# Altium PCB PCB_Node_breakout.PcbDoc
Units mm, origin at the board's own origin, x right, y up, seen from the top; angles counter-clockwise.
Board outline 81.5 x 51 mm, 2 copper layers (Top Layer, Bottom Layer), stack 1.671 mm thick; 3 components, 30 nets, 60 pads, 1 vias.
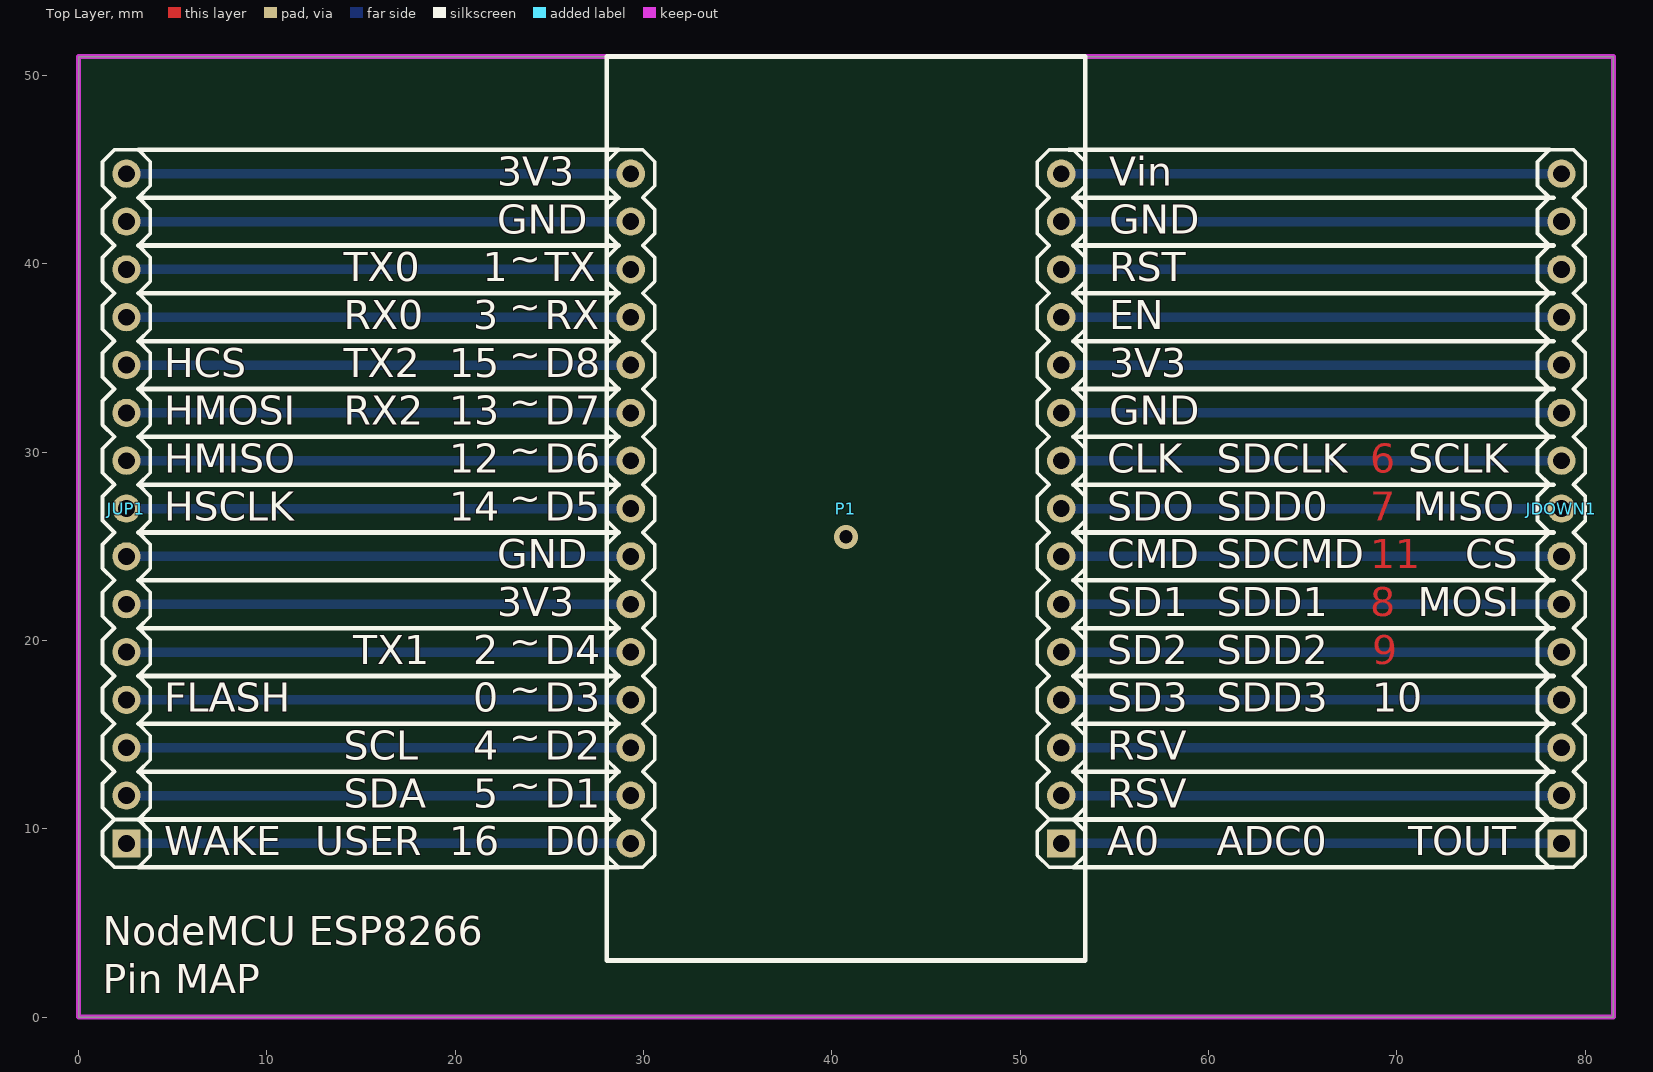
[diagram p0: Top Layer view]
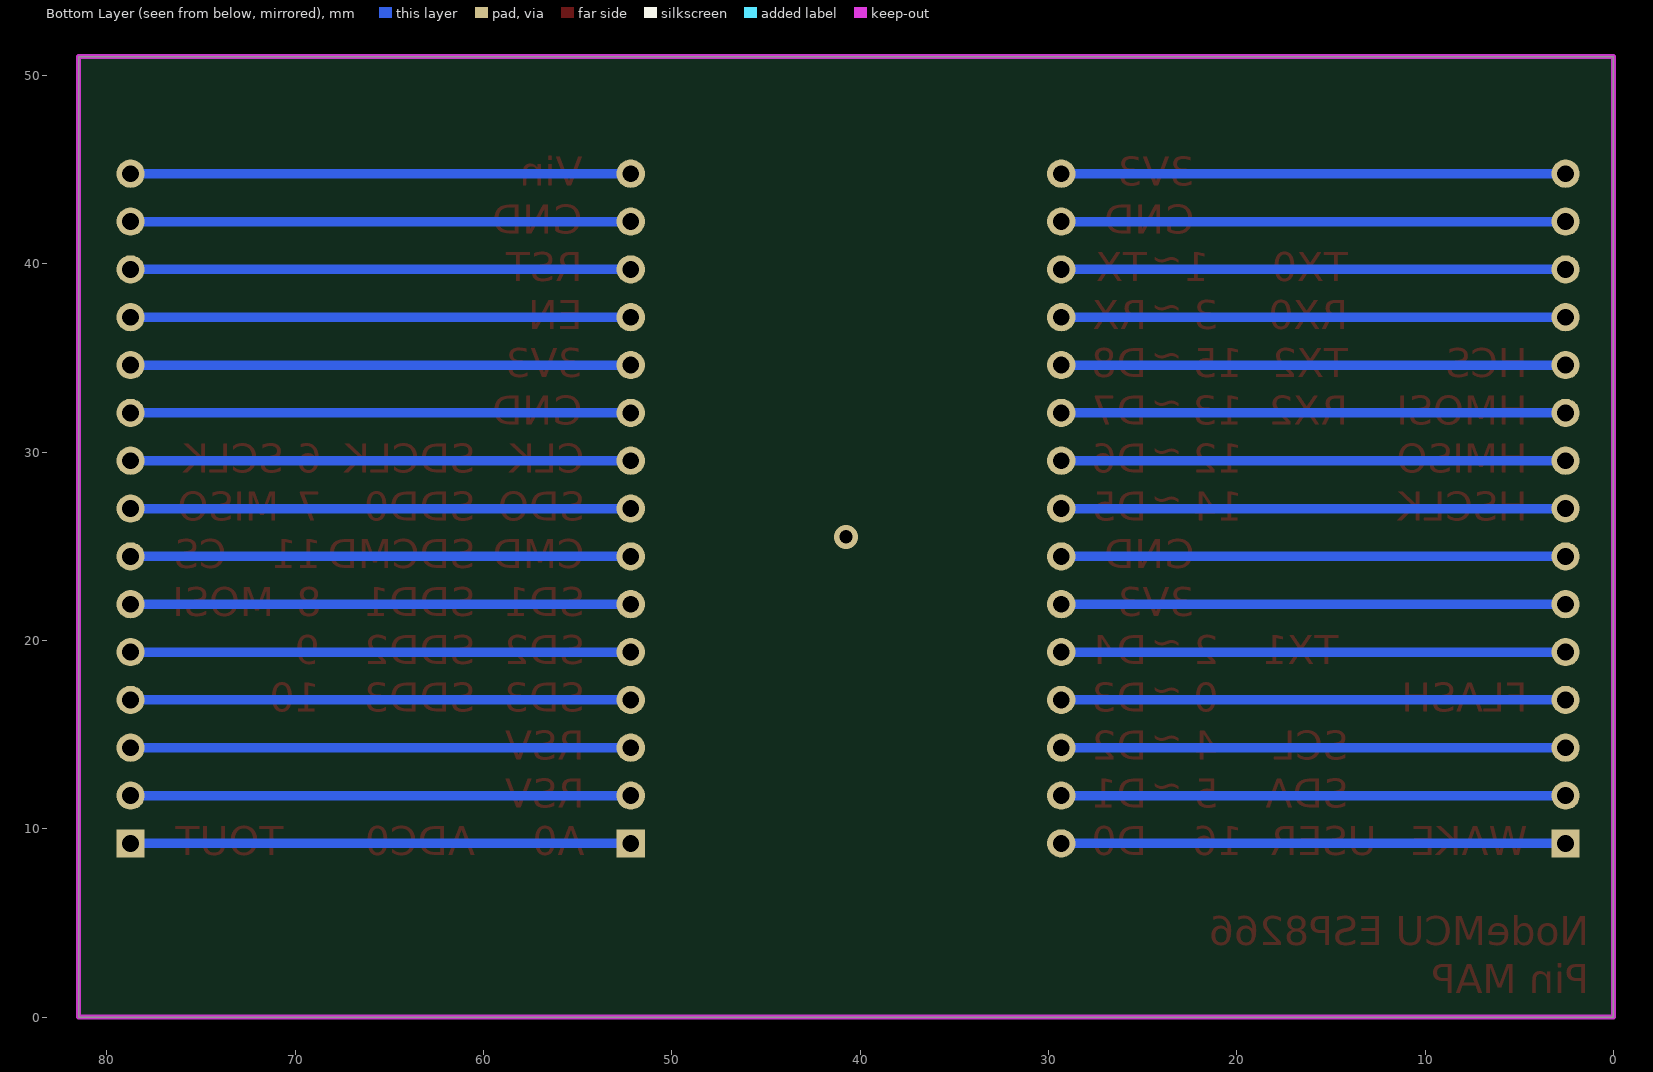
[diagram p1: Bottom Layer view, seen from below]

## Layer stack, top to bottom
Top Layer: signal copper 0.0356
Dielectric: core 1.6, FR-4, Dk 4.8
Bottom Layer: signal copper 0.0356

## Board outline
0,0 81.5,0 81.5,51 0,51

## Design rules (kind name [scope] priority, off if disabled: settings)
Clearance [All] p1: gap=0.254
PolygonConnect [All] p1: connectstyle=Relief reliefconductorwidth=0.254 reliefentries=4 polygonreliefangle="90 Angle"
RoutingVias [All] p1: holewidth=0.711 width=1.27 viastyle="Through Hole" minholewidth=0.711 minwidth=1.27 maxholewidth=0.711 maxwidth=1.27
SilkscreenOverComponentPads [All] p1: minsilkscreentomaskgap=0.254
SolderMaskExpansion [All] p1: expansion=0.102
Width [All] p1: maxlimit=0.508 minlimit=0.254 preferedwidth=0.508
27 further rules are at their usual default settings.

## Components (designator, comment, footprint, x,y, rotation, side; value= is the part's Value field where it differs from the comment)
JDOWN1 "HDR1X15" HDR1X15 78.74,9.22 r90 top
JUP1 "HDR1X15" HDR1X15 2.54,9.22 r90 top
P1 "Node" NODEPATTEN 40.75,27 r90 top locked

## Footprints (in the part's own frame and the unit in brackets; to place one, negate y for a bottom-side part, rotate by r counter-clockwise, add the part's x,y. Pads: shape width x height; smd on the part's side, far side on the other; paste and mask are expansions set on the pad)
HDR1X15 [mm]
  rect 1.5x1.5 hole 0.9: 1(0,0)
  round 1.5 hole 0.9: 2(2.54,0) 3(5.08,0) 4(7.62,0) 5(10.16,0) 6(12.7,0) 7(15.24,0) 8(17.78,0) 9(20.32,0) 10(22.86,0) 11(25.4,0) 12(27.94,0) 13(30.48,0) 14(33.02,0) 15(35.56,0)
  silkscreen extent -1.27,-1.27 36.83,1.27
NODEPATTEN [mm]
  rect 1.5x1.5 hole 0.9: 1(-17.78,-11.43)
  round 1.5 hole 0.9: 2(-15.24,-11.43) 3(-12.7,-11.43) 4(-10.16,-11.43) 5(-7.62,-11.43) 6(-5.08,-11.43) 7(-2.54,-11.43) 8(0,-11.43) 9(2.54,-11.43) 10(5.08,-11.43) 11(7.62,-11.43) 12(10.16,-11.43) 13(12.7,-11.43) 14(15.24,-11.43) 15(17.78,-11.43) 16(17.78,11.43) 17(15.24,11.43) 18(12.7,11.43) 19(10.16,11.43) 20(7.62,11.43) 21(5.08,11.43) 22(2.54,11.43) 23(0,11.43) 24(-2.54,11.43) 25(-5.08,11.43) 26(-7.62,11.43) 27(-10.16,11.43) 28(-12.7,11.43) 29(-15.24,11.43) 30(-17.78,11.43)
  silkscreen extent -24,-12.7 24,12.7

## Part data
P1: library part NodePatten

## Via types
v1: diameter 1.27, hole 0.711, Top Layer to Bottom Layer, 1 vias

## Nets (pads, with @x,y where several pads share a name; then routed paths per layer and width w, separated by ;. In a path a pad name is that pad's centre, name@x,y a point inside that pad or via, vN(x,y) a via of type N, cw(c..) or ccw(c..) an arc to the next point about the centre after c; other vN are vias at no path point)
NetJDOWN1_1: JDOWN1.1 P1.1 | length 26.6
  Bottom Layer w0.508: P1.1 JDOWN1.1
NetJDOWN1_2: JDOWN1.2 P1.2 | length 26.6
  Bottom Layer w0.508: P1.2 JDOWN1.2
NetJDOWN1_3: JDOWN1.3 P1.3 | length 26.6
  Bottom Layer w0.508: P1.3 JDOWN1.3
NetJDOWN1_4: JDOWN1.4 P1.4 | length 26.6
  Bottom Layer w0.508: P1.4 JDOWN1.4
NetJDOWN1_5: JDOWN1.5 P1.5 | length 26.6
  Bottom Layer w0.508: P1.5 JDOWN1.5
NetJDOWN1_6: JDOWN1.6 P1.6 | length 26.6
  Bottom Layer w0.508: P1.6 JDOWN1.6
NetJDOWN1_7: JDOWN1.7 P1.7 | length 26.6
  Bottom Layer w0.508: P1.7 JDOWN1.7
NetJDOWN1_8: JDOWN1.8 P1.8 | length 26.6
  Bottom Layer w0.508: P1.8 JDOWN1.8
NetJDOWN1_9: JDOWN1.9 P1.9 | length 26.6
  Bottom Layer w0.508: P1.9 JDOWN1.9
NetJDOWN1_10: JDOWN1.10 P1.10 | length 26.6
  Bottom Layer w0.508: P1.10 JDOWN1.10
NetJDOWN1_11: JDOWN1.11 P1.11 | length 26.6
  Bottom Layer w0.508: P1.11 JDOWN1.11
NetJDOWN1_12: JDOWN1.12 P1.12 | length 26.6
  Bottom Layer w0.508: P1.12 JDOWN1.12
NetJDOWN1_13: JDOWN1.13 P1.13 | length 26.6
  Bottom Layer w0.508: P1.13 JDOWN1.13
NetJDOWN1_14: JDOWN1.14 P1.14 | length 26.6
  Bottom Layer w0.508: P1.14 JDOWN1.14
NetJDOWN1_15: JDOWN1.15 P1.15 | length 26.6
  Bottom Layer w0.508: P1.15 JDOWN1.15
NetJUP1_1: JUP1.1 P1.30 | length 26.8
  Bottom Layer w0.508: JUP1.1 P1.30
NetJUP1_2: JUP1.2 P1.29 | length 26.8
  Bottom Layer w0.508: JUP1.2 P1.29
NetJUP1_3: JUP1.3 P1.28 | length 26.8
  Bottom Layer w0.508: JUP1.3 P1.28
NetJUP1_4: JUP1.4 P1.27 | length 26.8
  Bottom Layer w0.508: JUP1.4 P1.27
NetJUP1_5: JUP1.5 P1.26 | length 26.8
  Bottom Layer w0.508: JUP1.5 P1.26
NetJUP1_6: JUP1.6 P1.25 | length 26.8
  Bottom Layer w0.508: JUP1.6 P1.25
NetJUP1_7: JUP1.7 P1.24 | length 26.8
  Bottom Layer w0.508: JUP1.7 P1.24
NetJUP1_8: JUP1.8 P1.23 | length 26.8
  Bottom Layer w0.508: JUP1.8 P1.23
NetJUP1_9: JUP1.9 P1.22 | length 26.8
  Bottom Layer w0.508: JUP1.9 P1.22
NetJUP1_10: JUP1.10 P1.21 | length 26.8
  Bottom Layer w0.508: JUP1.10 P1.21
NetJUP1_11: JUP1.11 P1.20 | length 26.8
  Bottom Layer w0.508: JUP1.11 P1.20
NetJUP1_12: JUP1.12 P1.19 | length 26.8
  Bottom Layer w0.508: JUP1.12 P1.19
NetJUP1_13: JUP1.13 P1.18 | length 26.8
  Bottom Layer w0.508: JUP1.13 P1.18
NetJUP1_14: JUP1.14 P1.17 | length 26.8
  Bottom Layer w0.508: JUP1.14 P1.17
NetJUP1_15: JUP1.15 P1.16 | length 26.8
  Bottom Layer w0.508: JUP1.15 P1.16
copper on no net:
  other v1: 40.75,25.5

## Keep-outs
Keep-Out Layer:
  the board outline again, w0.254

## Other copper
Top Layer:
  text "3V3" at 22.225,44.145 h1.52
  text "Vin" at 54.72,44.145 h1.52
  text "GND" at 22.225,41.605 h1.52
  text "GND" at 54.72,41.605 h1.52
  text "TX0" at 14.08,39.065 h1.52
  text "1" at 21.463,39.065 h1.52
  text "~" at 22.86,39.065 h2.52
  text "TX" at 24.765,39.065 h1.52
  text "RST" at 54.72,39.065 h1.52
  text "RX0" at 14.08,36.525 h1.52
  text "3" at 20.955,36.525 h1.52
  text "~" at 22.86,36.525 h2.52
  text "RX" at 24.765,36.525 h1.52
  text "EN" at 54.72,36.525 h1.52
  text "HCS" at 4.555,33.985 h1.52
  text "TX2" at 14.08,33.985 h1.52
  text "15" at 19.685,33.985 h1.52
  text "~" at 22.86,33.985 h2.52
  text "D8" at 24.765,33.985 h1.52
  text "3V3" at 54.72,33.985 h1.52
  text "HMOSI" at 4.555,31.445 h1.52
  text "RX2" at 14.08,31.445 h1.52
  text "13" at 19.685,31.445 h1.52
  text "~" at 22.86,31.445 h2.52
  text "D7" at 24.765,31.445 h1.52
  text "GND" at 54.72,31.445 h1.52
  text "HMISO" at 4.555,28.905 h1.52
  text "12" at 19.685,28.905 h1.52
  text "~" at 22.86,28.905 h2.52
  text "D6" at 24.765,28.905 h1.52
  text "CLK" at 54.61,28.905 h1.52
  text "SDCLK" at 60.435,28.905 h1.52
  text "6" at 68.58,28.905 h1.52
  text "SCLK" at 70.595,28.905 h1.52
  text "HSCLK" at 4.555,26.365 h1.52
  text "14" at 19.685,26.365 h1.52
  text "~" at 22.86,26.365 h2.52
  text "D5" at 24.765,26.365 h1.52
  text "SDO" at 54.61,26.365 h1.52
  text "SDD0" at 60.435,26.365 h1.52
  text "7" at 68.58,26.365 h1.52
  text "MISO" at 70.849,26.365 h1.52
  text "GND" at 22.225,23.825 h1.52
  text "CMD" at 54.61,23.825 h1.52
  text "SDCMD" at 60.435,23.825 h1.52
  text "11" at 68.58,23.825 h1.52
  text "CS" at 73.642,23.825 h1.52
  text "3V3" at 22.225,21.285 h1.52
  text "SD1" at 54.61,21.285 h1.52
  text "SDD1" at 60.435,21.285 h1.52
  text "8" at 68.58,21.285 h1.52
  text "MOSI" at 71.103,21.285 h1.52
  text "TX1" at 14.588,18.745 h1.52
  text "2" at 20.955,18.745 h1.52
  text "~" at 22.86,18.745 h2.52
  text "D4" at 24.765,18.745 h1.52
  text "SD2" at 54.61,18.745 h1.52
  text "SDD2" at 60.435,18.745 h1.52
  text "9" at 68.69,18.745 h1.52
  text "FLASH" at 4.555,16.205 h1.52
  text "0" at 20.955,16.205 h1.52
  text "~" at 22.86,16.205 h2.52
  text "D3" at 24.765,16.205 h1.52
  text "SD3" at 54.61,16.205 h1.52
  text "SDD3" at 60.435,16.205 h1.52
  text "10" at 68.69,16.205 h1.52
  text "SCL" at 14.08,13.665 h1.52
  text "4" at 20.955,13.665 h1.52
  text "~" at 22.86,13.665 h2.52
  text "D2" at 24.765,13.665 h1.52
  text "RSV" at 54.61,13.665 h1.52
  text "SDA" at 14.08,11.125 h1.52
  text "5" at 20.955,11.125 h1.52
  text "~" at 22.86,11.125 h2.52
  text "D1" at 24.765,11.125 h1.52
  text "RSV" at 54.61,11.125 h1.52
  text "WAKE" at 4.555,8.585 h1.52
  text "USER" at 12.556,8.585 h1.52
  text "16" at 19.685,8.585 h1.52
  text "D0" at 24.765,8.585 h1.52
  text "A0" at 54.61,8.585 h1.52
  text "ADC0" at 60.435,8.585 h1.52
  text "TOUT" at 70.595,8.585 h1.52
  text "NodeMCU ESP8266" at 1.27,3.81 h1.52
  text "Pin MAP" at 1.27,1.27 h1.52

## Silkscreen, mask and mechanical layers (free items; w line width, h text height)
Top Overlay:
  lines w0.254: 3.175,7.95 28.685,7.95 ; 3.175,10.49 28.685,10.49 ; 3.175,13.03 28.685,13.03 ; 3.175,15.57 28.685,15.57 ; 3.175,18.11 28.685,18.11 ; 3.175,20.65 28.685,20.65 ; 3.175,23.19 28.685,23.19 ; 3.175,25.73 28.685,25.73 ; 3.175,28.27 28.685,28.27 ; 3.175,30.81 28.685,30.81 ; 3.175,33.35 28.685,33.35 ; 3.175,35.89 28.685,35.89 ; 3.175,38.43 28.685,38.43 ; 3.175,40.97 28.685,40.97 ; 3.175,43.51 28.685,43.51 ; 3.175,46.05 21.59,46.05 28.685,46.05 ; 52.595,46.05 78.105,46.05 ; 52.815,7.95 78.325,7.95 ; 52.815,10.49 78.325,10.49 ; 52.815,13.03 78.325,13.03 ; 52.815,15.57 78.325,15.57 ; 52.815,18.11 78.325,18.11 ; 52.815,20.65 78.325,20.65 ; 52.815,23.19 78.325,23.19 ; 52.815,25.73 78.325,25.73 ; 52.815,28.27 78.325,28.27 ; 52.815,30.81 78.325,30.81 ; 52.815,33.35 78.325,33.35 ; 52.815,35.89 78.325,35.89 ; 52.815,38.43 78.325,38.43 ; 52.815,40.97 78.325,40.97 ; 52.815,43.51 78.325,43.51
  text "3V3" at 22.225,44.145 h1.52
  text "Vin" at 54.72,44.145 h1.52
  text "GND" at 22.225,41.605 h1.52
  text "GND" at 54.72,41.605 h1.52
  text "TX0" at 14.08,39.065 h1.52
  text "1" at 21.463,39.065 h1.52
  text "~" at 22.86,39.065 h2.52
  text "TX" at 24.765,39.065 h1.52
  text "RST" at 54.72,39.065 h1.52
  text "RX0" at 14.08,36.525 h1.52
  text "3" at 20.955,36.525 h1.52
  text "~" at 22.86,36.525 h2.52
  text "RX" at 24.765,36.525 h1.52
  text "EN" at 54.72,36.525 h1.52
  text "HCS" at 4.555,33.985 h1.52
  text "TX2" at 14.08,33.985 h1.52
  text "15" at 19.685,33.985 h1.52
  text "~" at 22.86,33.985 h2.52
  text "D8" at 24.765,33.985 h1.52
  text "3V3" at 54.72,33.985 h1.52
  text "HMOSI" at 4.555,31.445 h1.52
  text "RX2" at 14.08,31.445 h1.52
  text "13" at 19.685,31.445 h1.52
  text "~" at 22.86,31.445 h2.52
  text "D7" at 24.765,31.445 h1.52
  text "GND" at 54.72,31.445 h1.52
  text "HMISO" at 4.555,28.905 h1.52
  text "12" at 19.685,28.905 h1.52
  text "~" at 22.86,28.905 h2.52
  text "D6" at 24.765,28.905 h1.52
  text "CLK" at 54.61,28.905 h1.52
  text "SDCLK" at 60.435,28.905 h1.52
  text "SCLK" at 70.595,28.905 h1.52
  text "HSCLK" at 4.555,26.365 h1.52
  text "14" at 19.685,26.365 h1.52
  text "~" at 22.86,26.365 h2.52
  text "D5" at 24.765,26.365 h1.52
  text "SDO" at 54.61,26.365 h1.52
  text "SDD0" at 60.435,26.365 h1.52
  text "MISO" at 70.849,26.365 h1.52
  text "GND" at 22.225,23.825 h1.52
  text "CMD" at 54.61,23.825 h1.52
  text "SDCMD" at 60.435,23.825 h1.52
  text "CS" at 73.642,23.825 h1.52
  text "3V3" at 22.225,21.285 h1.52
  text "SD1" at 54.61,21.285 h1.52
  text "SDD1" at 60.435,21.285 h1.52
  text "MOSI" at 71.103,21.285 h1.52
  text "TX1" at 14.588,18.745 h1.52
  text "2" at 20.955,18.745 h1.52
  text "~" at 22.86,18.745 h2.52
  text "D4" at 24.765,18.745 h1.52
  text "SD2" at 54.61,18.745 h1.52
  text "SDD2" at 60.435,18.745 h1.52
  text "FLASH" at 4.555,16.205 h1.52
  text "0" at 20.955,16.205 h1.52
  text "~" at 22.86,16.205 h2.52
  text "D3" at 24.765,16.205 h1.52
  text "SD3" at 54.61,16.205 h1.52
  text "SDD3" at 60.435,16.205 h1.52
  text "10" at 68.69,16.205 h1.52
  text "SCL" at 14.08,13.665 h1.52
  text "4" at 20.955,13.665 h1.52
  text "~" at 22.86,13.665 h2.52
  text "D2" at 24.765,13.665 h1.52
  text "RSV" at 54.61,13.665 h1.52
  text "SDA" at 14.08,11.125 h1.52
  text "5" at 20.955,11.125 h1.52
  text "~" at 22.86,11.125 h2.52
  text "D1" at 24.765,11.125 h1.52
  text "RSV" at 54.61,11.125 h1.52
  text "WAKE" at 4.555,8.585 h1.52
  text "USER" at 12.556,8.585 h1.52
  text "16" at 19.685,8.585 h1.52
  text "D0" at 24.765,8.585 h1.52
  text "A0" at 54.61,8.585 h1.52
  text "ADC0" at 60.435,8.585 h1.52
  text "TOUT" at 70.595,8.585 h1.52
  text "NodeMCU ESP8266" at 1.27,3.81 h1.52
  text "Pin MAP" at 1.27,1.27 h1.52